# Altium PCB SR_Latch_PCB.PcbDoc
Units mm, origin at the board's own origin, x right, y up, seen from the top; angles counter-clockwise.
Board outline 31 x 38.5 mm, 2 copper layers (Top Layer, Bottom Layer); 10 components, 24 nets, 48 pads, 1 vias.
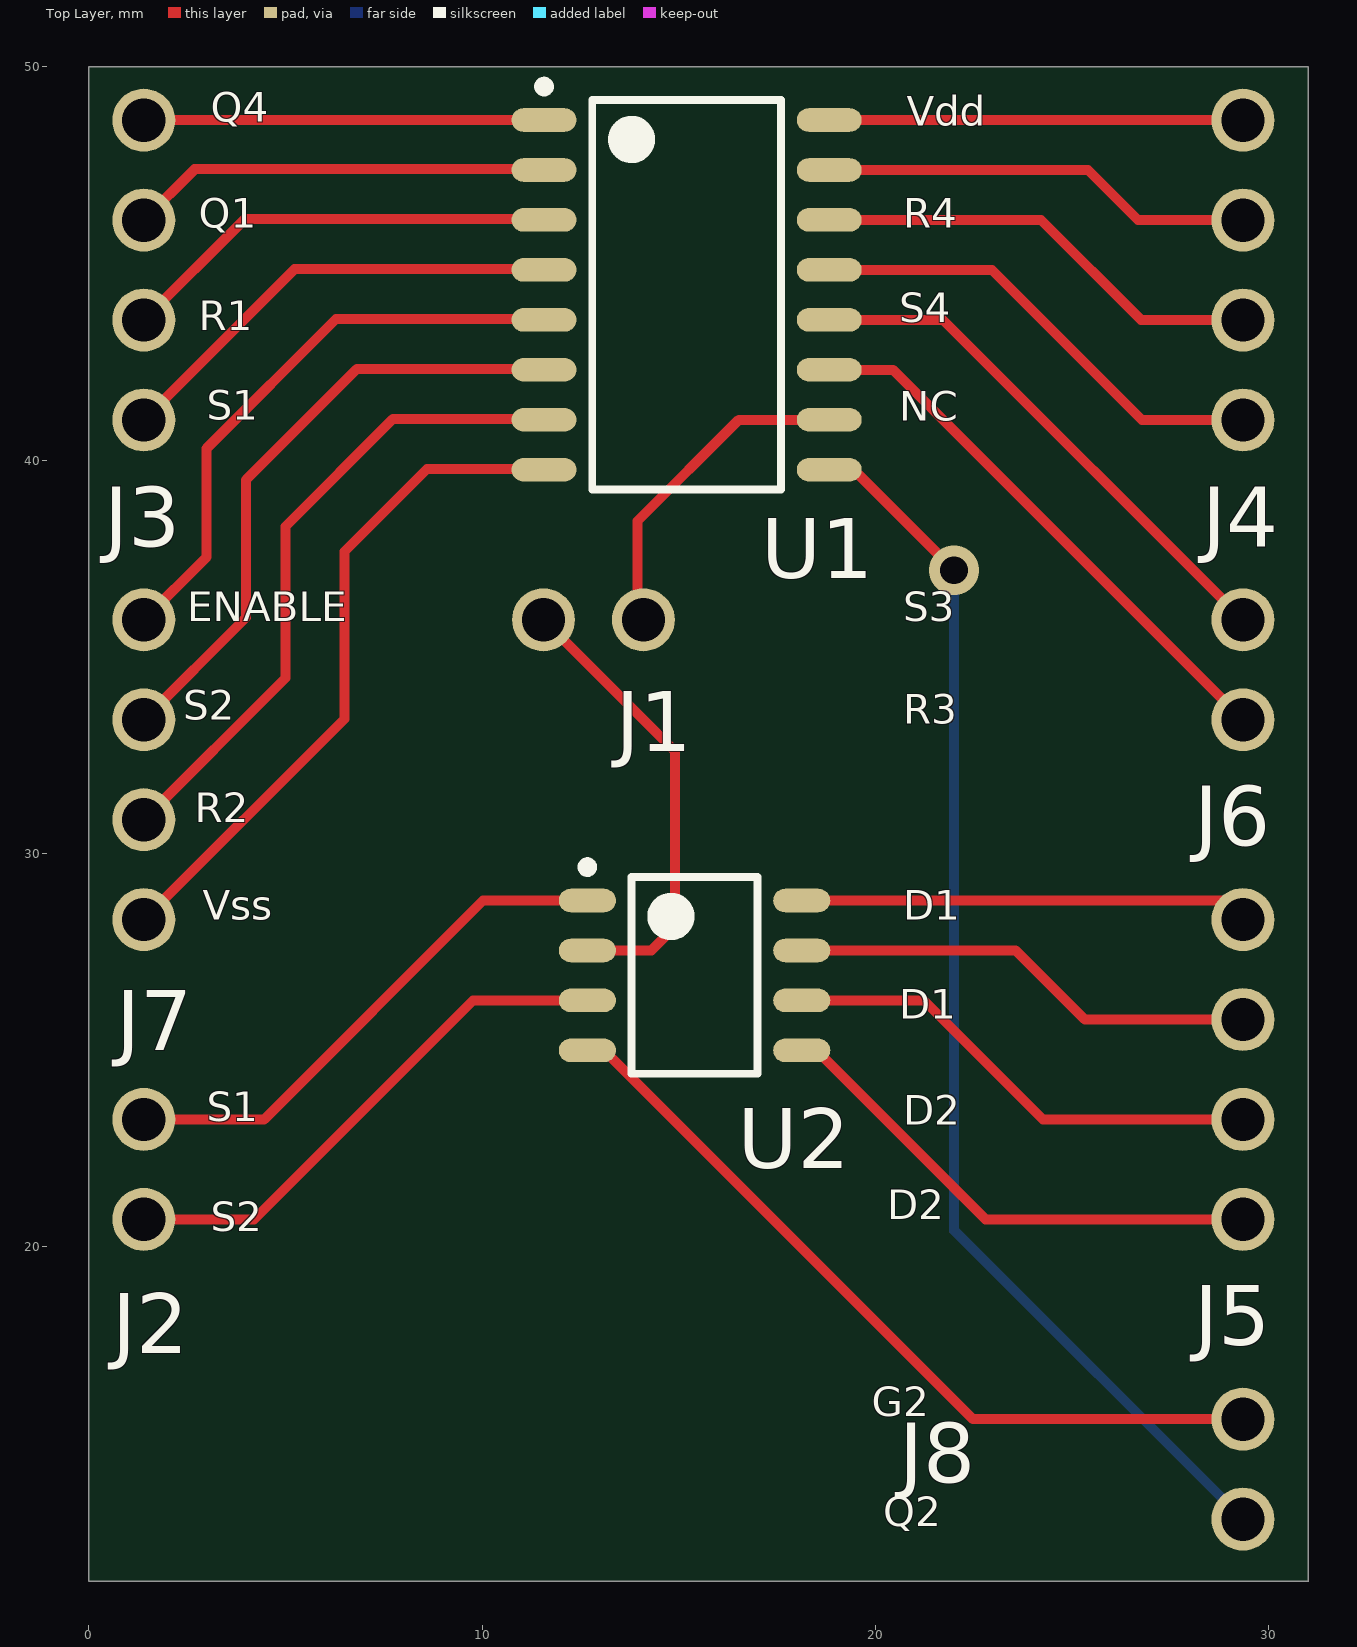
[diagram p0: Top Layer view]
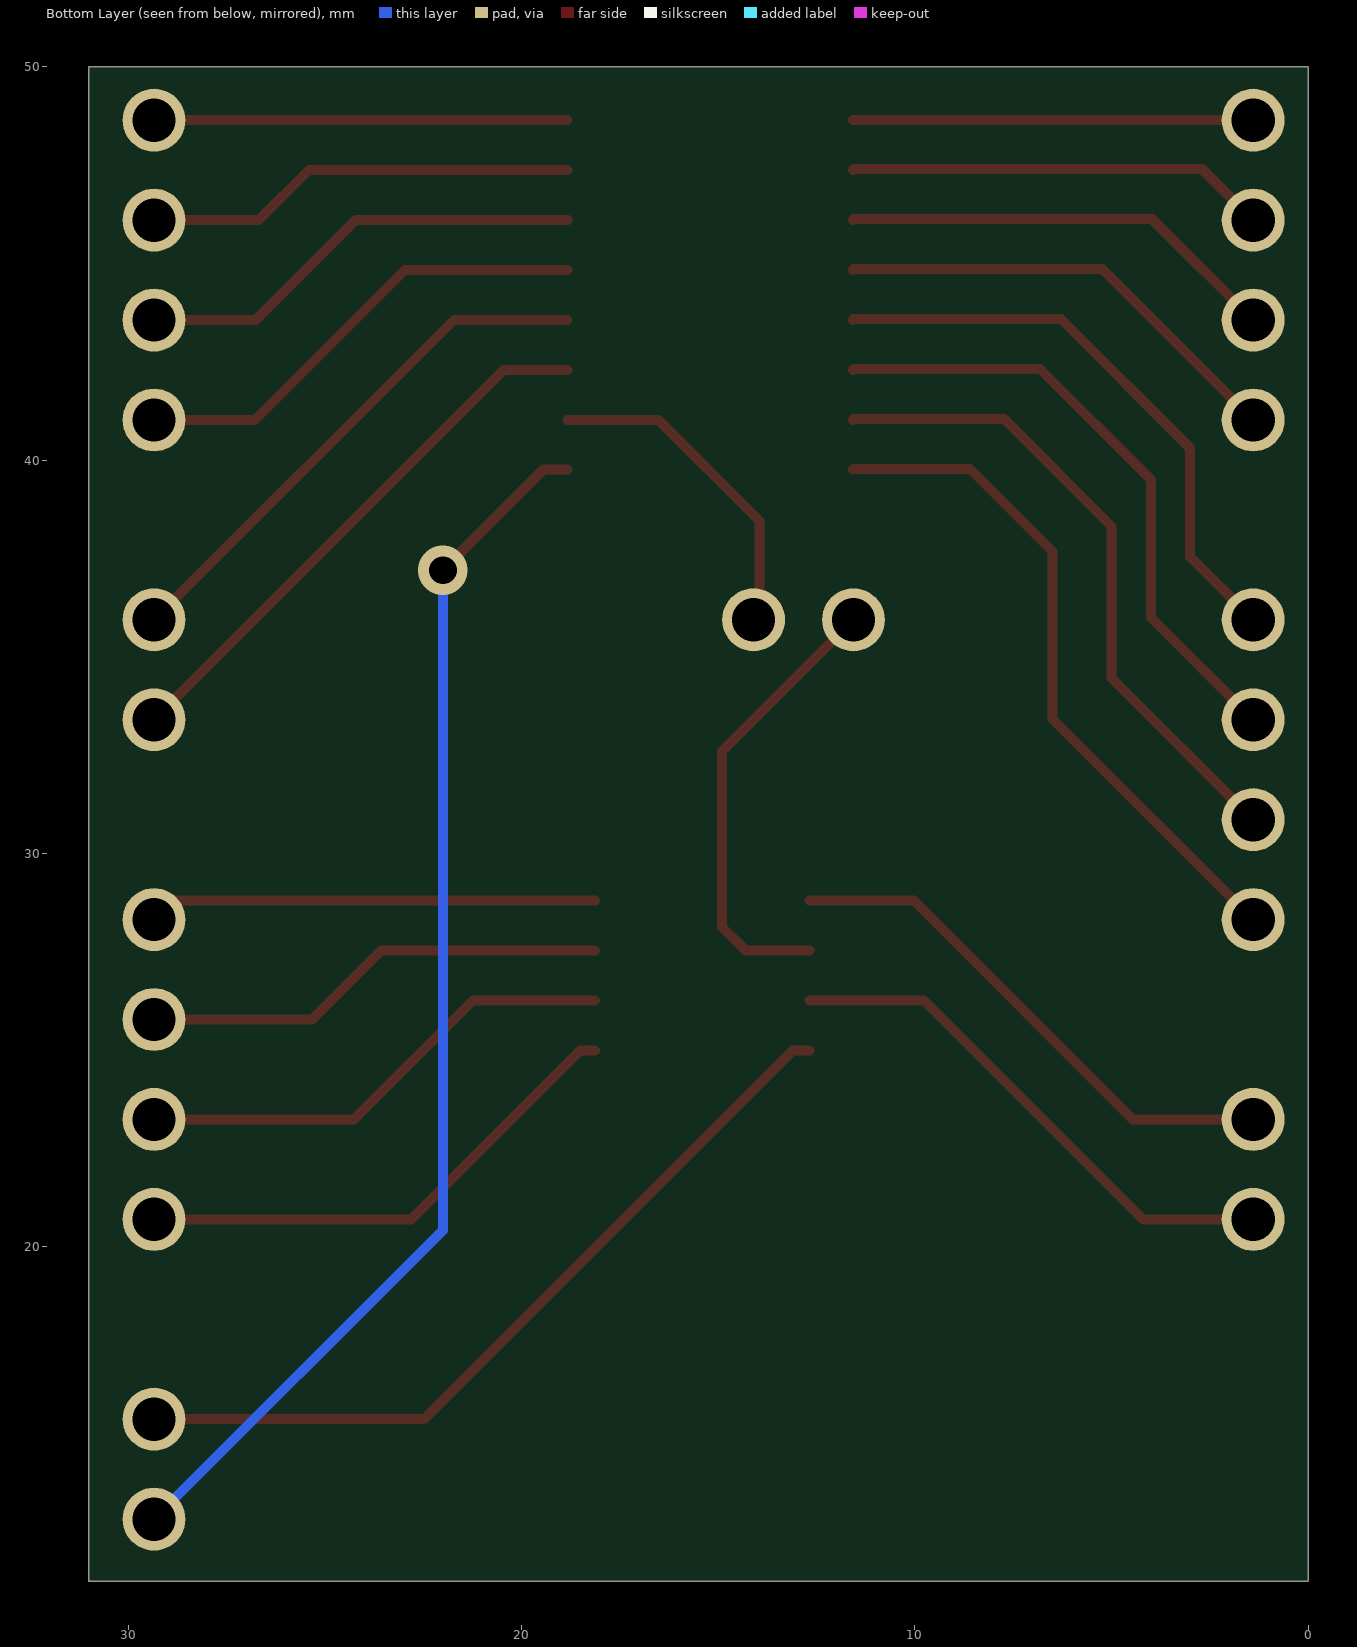
[diagram p1: Bottom Layer view, seen from below]
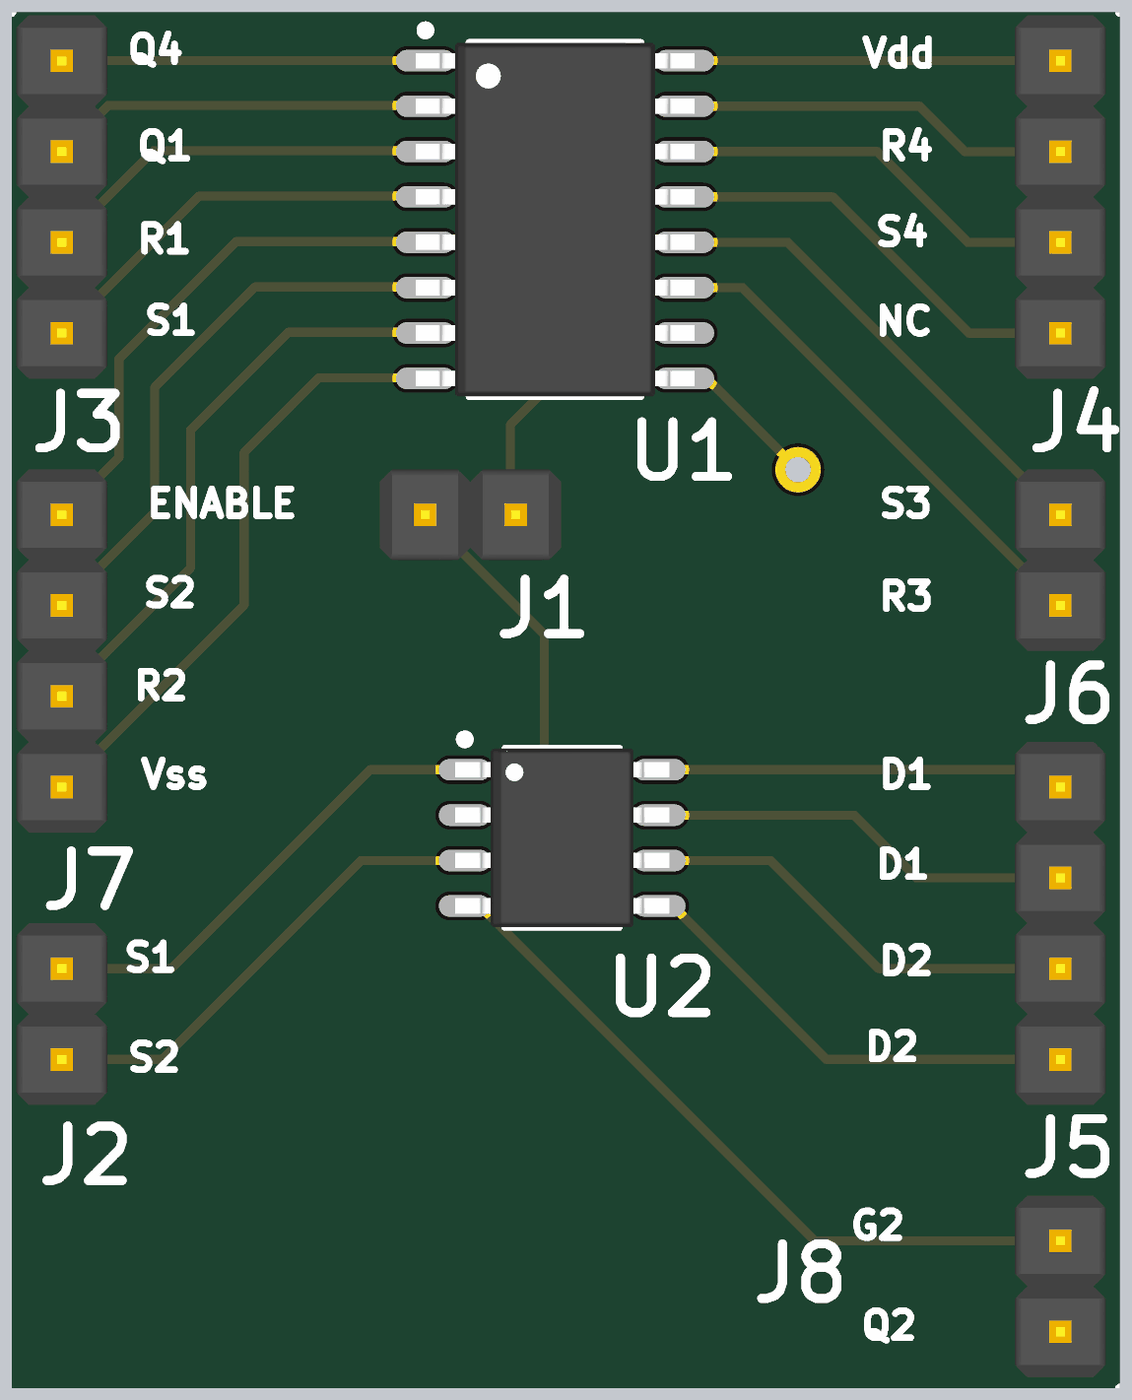
[diagram p2: 3D render of the assembled board from above, using the file's embedded part models]

## Layer stack, top to bottom
Top Solder: solder mask 0.0102, Solder Resist, Dk 3.5
Top Layer: signal copper 0.0356
Dielectric 1: dielectric 0.32, FR-4, Dk 4.8
Bottom Layer: signal copper 0.0356
Bottom Solder: solder mask 0.0102, Solder Resist, Dk 3.5

## Board outline
0,11.5 31,11.5 31,50 0,50

## Design rules (kind name [scope] priority, off if disabled: settings)
Clearance [All] p1: gap=0.254 ignorepadtopadclearanceinfootprint=TRUE except(0: Arc-Hole Track-Hole SMDPad-Hole THPad-Hole Via-Hole Fill-Hole Poly-Hole Region-Hole Text-Hole)
PolygonConnect [All] p1: connectstyle=Relief reliefconductorwidth=0.254 reliefentries=4 polygonreliefangle="90 Angle" airgapwidth=0.254
RoutingVias [All] p1: holewidth=0.711 width=1.27 viastyle="Through Hole" minholewidth=0.711 minwidth=1.27 maxholewidth=0.711 maxwidth=1.27
SolderMaskExpansion [All] p1: expansion=0.102
Width [All] p1: maxlimit=0.254 minlimit=0.254 preferedwidth=0.254
30 further rules are at their usual default settings.

## Components (designator, comment, footprint, x,y, rotation, side; value= is the part's Value field where it differs from the comment)
J1 "2 Pin Header" 2PIN_HEADER 11.56,35.94 r0 top
J2 "2 Pin Header" 2PIN_HEADER 1.4,23.24 r270 top
J3 "4PinHeader" 4PIN_HEADER 1.4,48.64 r270 top
J4 "4PinHeader" 4PIN_HEADER 29.34,41.02 r90 top
J5 "4PinHeader" 4PIN_HEADER 29.34,28.32 r270 top
J6 "2 Pin Header" 2PIN_HEADER 29.34,33.4 r90 top
J7 "4PinHeader" 4PIN_HEADER 1.4,35.94 r270 top
J8 "2 Pin Header" 2PIN_HEADER 29.34,13.08 r90 top
U1 "CD4043BNSR" SOIC-16SRLATCH 15.2,44.2 r0 top
U2 "IRF7103TRPBF" SOIC127P600X175-8N 15.4,26.9 r0 top

## Footprints (in the part's own frame and the unit in brackets; to place one, negate y for a bottom-side part, rotate by r counter-clockwise, add the part's x,y. Pads: shape width x height; smd on the part's side, far side on the other; paste and mask are expansions set on the pad)
2PIN_HEADER [mm]
  round 1.6 hole 1.1: 1(0,0) 2(2.54,0)
  body extent -1.27,-1.27 3.81,1.27, height 9.5
4PIN_HEADER [mm]
  round 1.6 hole 1.1: 1(0,0) 2(2.54,0) 3(5.08,0) 4(7.62,0)
  body extent -1.27,-1.27 8.89,1.27, height 9.5
SOIC127P600X175-8N [mm] "SOIC, 8-Leads, Body 4.90x3.90mm, Pitch 1.27mm, IPC Medium Density"
  oval 1.45x0.6 smd: 1(-2.725,1.905) 2(-2.725,0.635) 3(-2.725,-0.635) 4(-2.725,-1.905) 5(2.725,-1.905) 6(2.725,-0.635) 7(2.725,0.635) 8(2.725,1.905)
  silkscreen extent -2.85,-2.5 1.6,2.88, body extent -3,-2.5 3,2.5, height 1.75
SOIC-16SRLATCH [mm] "SOIC, 16-Leads, Body 10.20x5.30mm, Pitch 1.27mm, IPC Medium Density"
  oval 1.65x0.6 smd: 1(-3.625,4.445) 2(-3.625,3.175) 3(-3.625,1.905) 4(-3.625,0.635) 5(-3.625,-0.635) 6(-3.625,-1.905) 7(-3.625,-3.175) 8(-3.625,-4.445) 9(3.625,-4.445) 10(3.625,-3.175) 11(3.625,-1.905) 12(3.625,-0.635) 13(3.625,0.635) 14(3.625,1.905) 15(3.625,3.175) 16(3.625,4.445)
  silkscreen extent -3.75,-4.95 2.4,5.42, body extent -3.9,-4.95 3.9,4.95, height 2

## Part data
J1 J2 J6 J8: "2 pin connector"
U1: "IC NOR R/S LATCH 3ST QUAD 16SO", Case/Package=SOP, High Level Output Current=-4.2mA, Low Level Output Current=4.2mA, Manufacturer="Texas Instruments", Manufacturer Part Number=CD4043BNSRE4, Max Operating Temperature=125°C, Max Supply Voltage=18V, Min Operating Temperature=-55°C, Min Supply Voltage=3V, Output Current=6.8mA, Package Quantity=2000, Quiescent Current=40nA, Supplier Part Number 1=595-CD4043BNSRE4, ComponentLink1Description=https://www.verical.com/server-webapp/html/getDatasheet?partID=519121&src-supplier=Verical, ComponentLink1URL=https://www.verical.com/server-webapp/html/getDatasheet?partID=519121&src-supplier=Verical, ComponentLink2Description=http://www.ti.com/lit/ds/symlink/cd4043b.pdf?src-supplier=Digi-Key, ComponentLink2URL=http://www.ti.com/lit/ds/symlink/cd4043b.pdf?src-supplier=Digi-Key, Contact Plating=Gold, Independent Circuits=4, Lead Free="Lead Free", Logic Function=Latch,NOR, Mount="Surface Mount", Number of Bits=4, Number of Circuits=1, Number of Elements=1, Number of Input Lines=8, Number of Output Lines=4, Number of Pins=16, Packaging="Tape and Reel", Polarity=Non-Inverting, Pricing 1="1=0.51, 10=0.419, 50=0.419, 100=0.256, 1000=0.198, 10000=0.157 (USD)", Propagation Delay=300ns, Radiation Hardening=No, Stock 1=0, Supplier 1=Mouser, Turn-On Delay Time=50ns, Weight=0.007079oz
U2: "MOSFET 2N-CH 50V 3A 8-SOIC", Case/Package=SOIC, Continuous Drain Current (ID)=3A, Drain to Source Breakdown Voltage=50V, Drain to Source Resistance=200mR, Gate to Source Voltage (Vgs)=20V, Input Capacitance=290pF, Manufacturer="International Rectifier", Max Operating Temperature=150°C, Max Power Dissipation=2W, Min Operating Temperature=-55°C, On-State Resistance=130mR, Package Quantity=4000, Supplier Part Number 1=IRF7103PBFDKR-ND, Threshold Voltage=3V, ComponentLink1Description=http://www.farnell.com/datasheets/34661.pdf?src-supplier=Element14, ComponentLink1URL=http://www.farnell.com/datasheets/34661.pdf?src-supplier=Element14, ComponentLink2Description=http://www.irf.com/product-info/datasheets/data/irf7103.pdf?src-supplier=Avnet, ComponentLink2URL=http://www.irf.com/product-info/datasheets/data/irf7103.pdf?src-supplier=Avnet, ComponentLink3Description=http://www.alliedelec.com/m/d/63081131869883836316976ae6e75666.pdf?src-supplier=Allied+Electronics, ComponentLink3URL=http://www.alliedelec.com/m/d/63081131869883836316976ae6e75666.pdf?src-supplier=Allied+Electronics, ComponentLink4Description=http://www.mouser.com/ds/2/200/irf7103pbf-221493.pdf?src-supplier=Mouser, ComponentLink4URL=http://www.mouser.com/ds/2/200/irf7103pbf-221493.pdf?src-supplier=Mouser, ComponentLink5Description=https://www.verical.com/server-webapp/html/getDatasheet?partID=31726&src-supplier=Verical, ComponentLink5URL=https://www.verical.com/server-webapp/html/getDatasheet?partID=31726&src-supplier=Verical, ComponentLink6Description=http://www.irf.com/product-info/datasheets/data/irf7103pbf.pdf?src-supplier=Future+Electronics, ComponentLink6URL=http://www.irf.com/product-info/datasheets/data/irf7103pbf.pdf?src-supplier=Future+Electronics, ComponentLink7Description=http://www.irf.com/product-info/datasheets/data/irf7103pbf.pdf?src-supplier=Digi-Key, ComponentLink7URL=http://www.irf.com/product-info/datasheets/data/irf7103pbf.pdf?src-supplier=Digi-Key, ComponentLink8Description=https://www.infineon.com/dgdl/irf7103pbf.pdf?fileId=5546d462533600a4015355f0f0141ac6&src-supplier=Digi-Key, ComponentLink8URL=https://www.infineon.com/dgdl/irf7103pbf.pdf?fileId=5546d462533600a4015355f0f0141ac6&src-supplier=Digi-Key, ComponentLink9Description=http://www.irf.com/product-info/datasheets/data/irf7103.pdf?src-supplier=Avnet+Europe, ComponentLink9URL=http://www.irf.com/product-info/datasheets/data/irf7103.pdf?src-supplier=Avnet+Europe, ComponentLink10Description=http://www.irf.com/product-info/datasheets/data/irf7103pbf.pdf?src-supplier=Element14, ComponentLink10URL=http://www.irf.com/product-info/datasheets/data/irf7103pbf.pdf?src-supplier=Element14, Current Rating=3A, Drain to Source Voltage (Vdss)=50V, Element Configuration=Dual, Fall Time=25ns, FET Type="2 N-Channel", Height=1.5mm, Lead Free="Lead Free", Length=5mm, Manufacturer Part Number=IRF7103TRPBF, Mount="Surface Mount", Nominal Vgs=3V, Number of Elements=2, Number of Pins=8, Packaging="Tape and Reel", Power Dissipation=2W, Pricing 1="1=0.96, 10=0.843, 100=0.6501, 500=0.48154, 1000=0.38523 (USD)", Radiation Hardening=No, Rds On Max=130mR, REACH SVHC="No SVHC", Rise Time=8ns, Stock 1=72907, Supplier 1=Digi-Key, Turn-Off Delay Time=45ns, Turn-On Delay Time=9ns, Voltage Rating (DC)=50V, Width=4mm

## Via types
v1: diameter 1.27, hole 0.711, Top Layer to Bottom Layer, 1 vias

## Nets (pads, with @x,y where several pads share a name; then routed paths per layer and width w, separated by ;. In a path a pad name is that pad's centre, name@x,y a point inside that pad or via, vN(x,y) a via of type N, cw(c..) or ccw(c..) an arc to the next point about the centre after c; other vN are vias at no path point)
NetJ1_1: J1.1 U2.2 | length 11.7
  Top Layer w0.254: J1.1 14.9,32.6 14.9,28.135 14.3,27.535 U2.2
NetJ1_2: J1.2 U1.10 | length 8.5
  Top Layer w0.254: J1.2 13.949,36.091 13.949,38.449 16.525,41.025 U1.10
NetJ2_1: J2.1 U2.1 | length 13.6
  Top Layer w0.254: J2.1 4.46,23.24 10.025,28.805 U2.1
NetJ2_2: J2.2 U2.3 | length 13.6
  Top Layer w0.254: J2.2 4.2,20.7 9.765,26.265 U2.3
NetJ3_1: J3.1 U1.1 | length 10.2
  Top Layer w0.254: J3.1 1.405,48.645 U1.1
NetJ3_2: J3.2 U1.2 | length 10.7
  Top Layer w0.254: J3.2 2.695,47.395 11.555,47.395 U1.2
NetJ3_3: J3.3 U1.3 | length 11.2
  Top Layer w0.254: J3.3 3.965,46.125 11.555,46.125 U1.3
NetJ3_4: J3.4 U1.4 | length 11.8
  Top Layer w0.254: J3.4 5.235,44.855 11.555,44.855 U1.4
NetJ4_1: J4.1 U1.13 | length 12.1
  Top Layer w0.254: U1.13 22.96,44.835 26.775,41.02 J4.1
NetJ4_2: J4.2 U1.14 | length 11.6
  Top Layer w0.254: U1.14 24.21,46.105 26.755,43.56 J4.2
NetJ4_3: J4.3 U1.15 | length 11
  Top Layer w0.254: U1.15 25.4,47.375 26.675,46.1 J4.3
NetJ4_4: J4.4 U1.16 | length 10.5
  Top Layer w0.254: U1.16 29.335,48.645 J4.4
NetJ5_1: J5.1 U2.8 | length 11.4
  Top Layer w0.254: U2.8 28.855,28.805 J5.1
NetJ5_2: J5.2 U2.7 | length 11.9
  Top Layer w0.254: U2.7 23.565,27.535 25.32,25.78 J5.2
NetJ5_3: J5.3 U2.6 | length 12.5
  Top Layer w0.254: U2.6 21.235,26.265 24.26,23.24 J5.3
NetJ5_4: J5.4 U2.5 | length 13
  Top Layer w0.254: U2.5 18.505,24.995 22.8,20.7 J5.4
NetJ6_1: J6.1 U1.11 | length 14.2
  Top Layer w0.254: U1.11 20.445,42.295 J6.1
NetJ6_2: J6.2 U1.12 | length 13.7
  Top Layer w0.254: U1.12 21.715,43.565 J6.2
NetJ7_1: J7.1 U1.5 | length 15
  Top Layer w0.254: J7.1 3,37.54 3,40.3 6.285,43.585 11.555,43.585 U1.5
NetJ7_2: J7.2 U1.6 | length 15.9
  Top Layer w0.254: J7.2 4,36 4,39.5 6.815,42.315 11.555,42.315 U1.6
NetJ7_3: J7.3 U1.7 | length 16.7
  Top Layer w0.254: J7.3 5,34.46 5,38.315 7.73,41.045 11.555,41.045 U1.7
NetJ7_4: J7.4 U1.8 | length 17.4
  Top Layer w0.254: J7.4 6.5,33.42 6.5,37.675 8.6,39.775 11.555,39.775 U1.8
NetJ8_1: J8.1 U1.9 | length 31.4
  Top Layer w0.254: U1.9 19.445,39.755 v1(22,37.2)
  Bottom Layer w0.254: v1(22,37.2) 22,20.42 J8.1
NetJ8_2: J8.2 U2.4 | length 20.8
  Top Layer w0.254: U2.4 13.105,24.995 22.48,15.62 J8.2 J8.2@29.16,15.8

## Silkscreen, mask and mechanical layers (free items; w line width, h text height)
Top Overlay:
  text "Q4" at 3.1,48.6 h0.75
  text "Vdd" at 20.8,48.5 h0.75
  text "Q1" at 2.8,45.9 h0.75
  text "R4" at 20.7,45.9 h0.75
  text "S4" at 20.6,43.5 h0.75
  text "R1" at 2.8,43.3 h0.75
  text "S1" at 3,41.02 h0.75
  text "NC" at 20.6,41 h0.75
  text "ENABLE" at 2.5,35.9 h0.75
  text "S3" at 20.7,35.9 h0.75
  text "S2" at 2.4,33.4 h0.75
  text "R3" at 20.7,33.3 h0.75
  text "R2" at 2.7,30.8 h0.75
  text "Vss" at 2.9,28.32 h0.75
  text "D1" at 20.7,28.32 h0.75
  text "D1" at 20.6,25.8 h0.75
  text "S1" at 3,23.2 h0.75
  text "D2" at 20.7,23.1 h0.75
  text "D2" at 20.3,20.7 h0.75
  text "S2" at 3.1,20.4 h0.75
  text "G2" at 19.9,15.7 h0.75
  text "Q2" at 20.2,12.9 h0.75
Mechanical 1:
  lines w0.1: 31,11.5 0,11.5 0,50 31,50 31,11.5 ; 31,11.5 31,11.5

## Dimensions
31,11.5 to 31,50.304 on Top Overlay
0,50 to 31,50 on Top Overlay